# Altium PCB 2014_ConnecteurChargeur.PCBDOC
Units mil, origin at the board's own origin, x right, y up, seen from the top; angles counter-clockwise.
Board outline 1191.13 x 994.28 mil, 4 copper layers (1-TOP, 2-GND, 3-SIGNAL, 4-BOTTOM); 8 components, 2 nets, 60 pads, 9 vias.
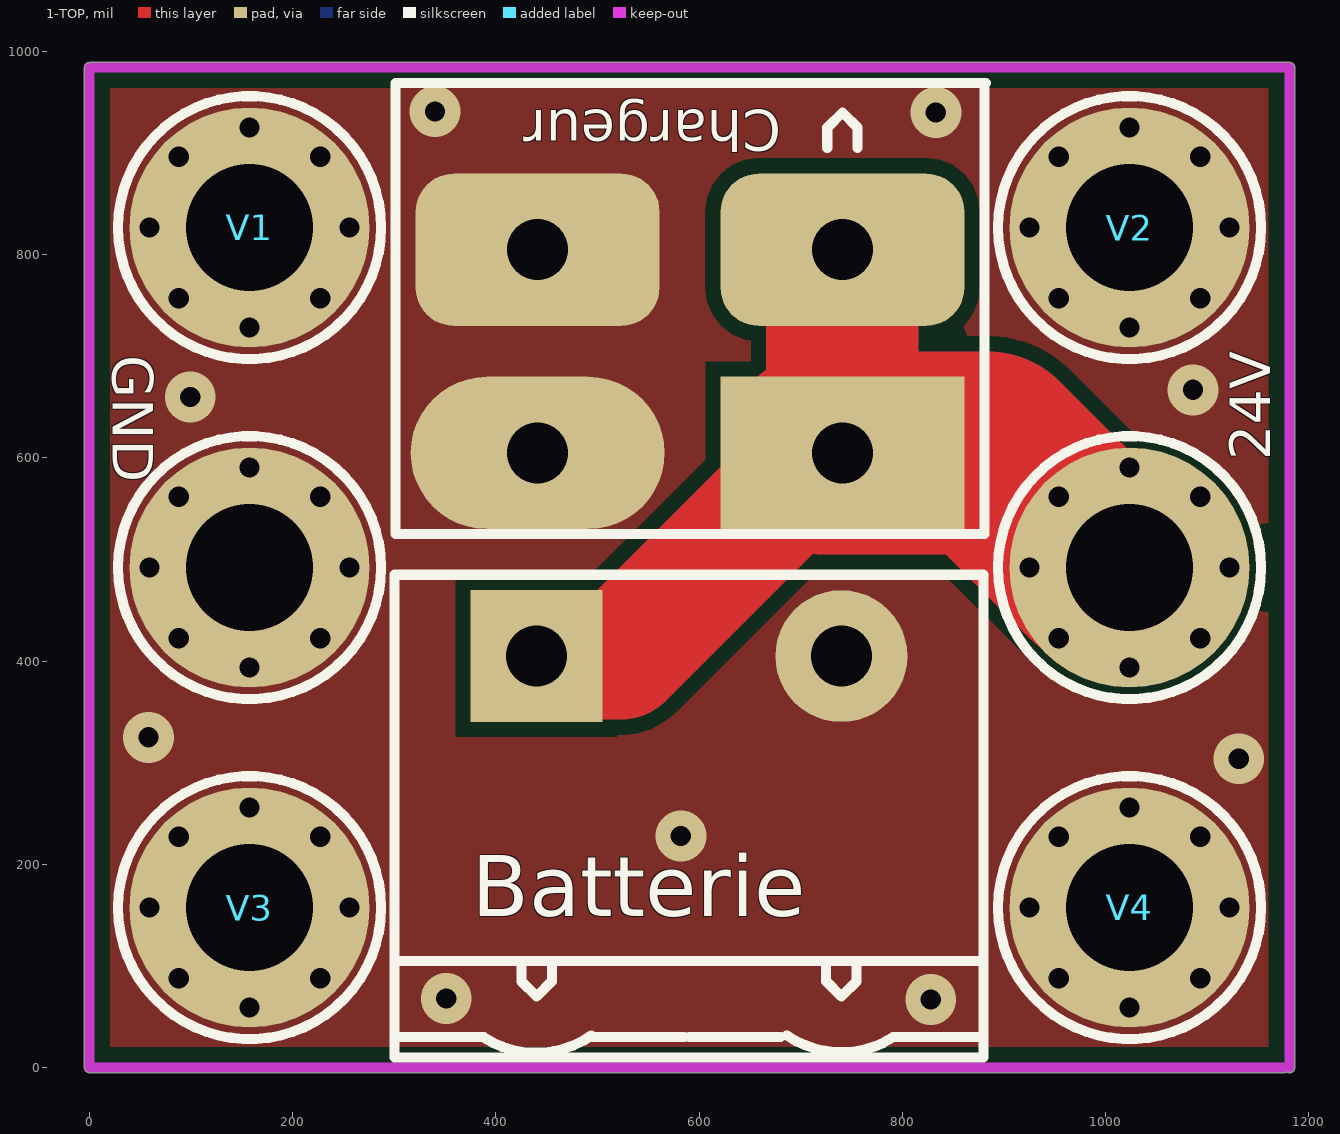
[diagram p0: 1-TOP view]
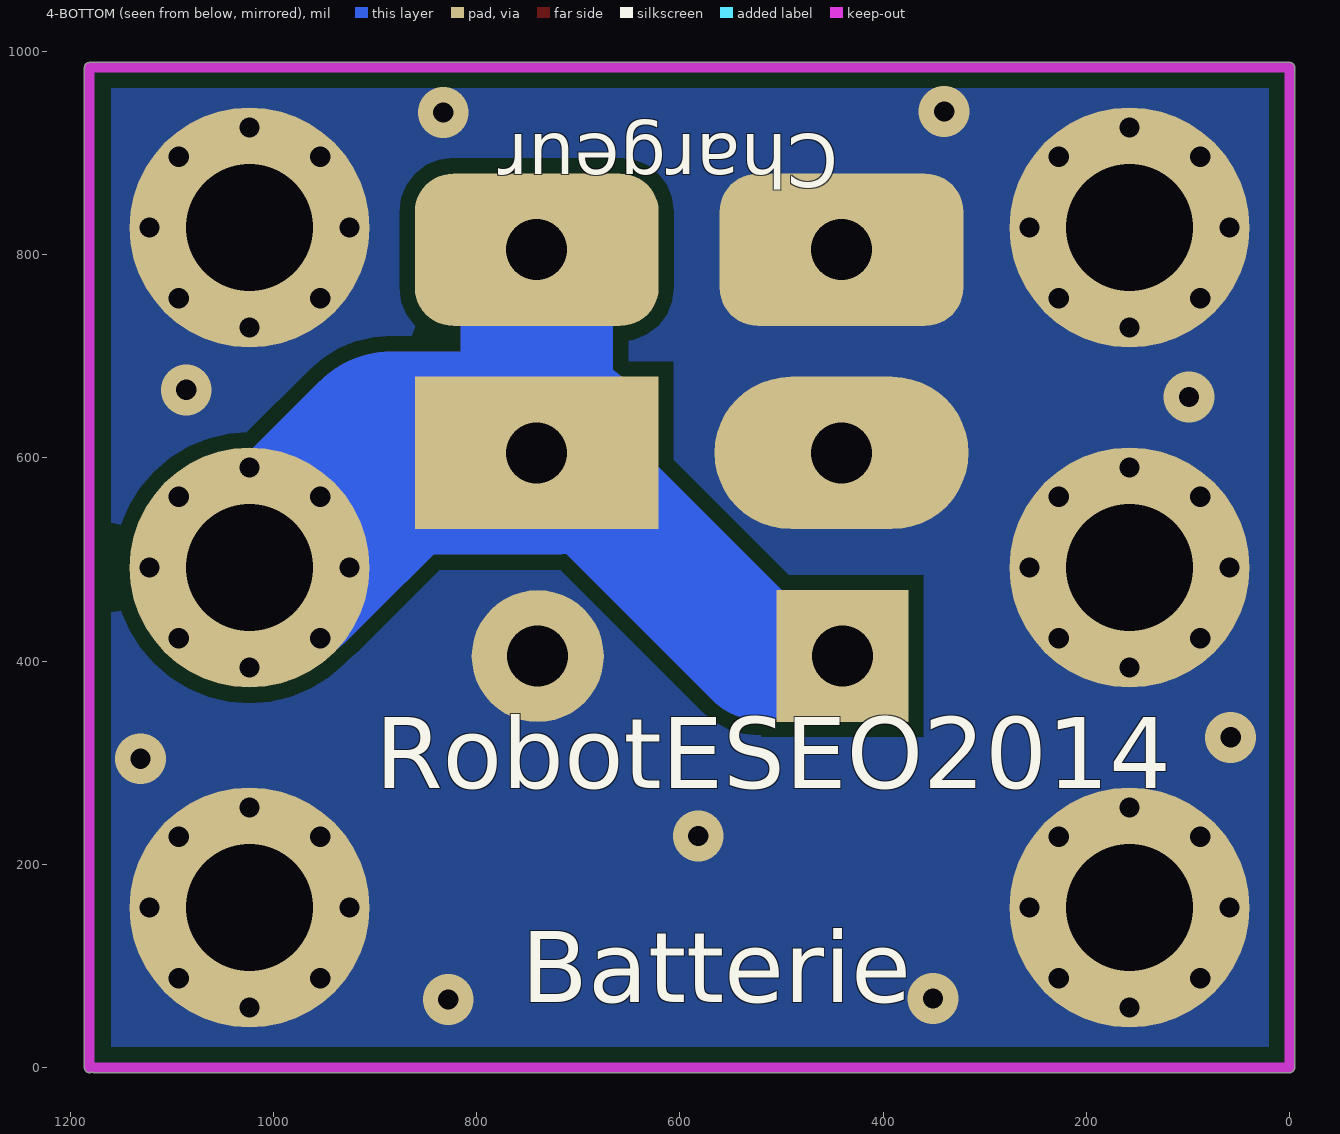
[diagram p1: 4-BOTTOM view, seen from below]
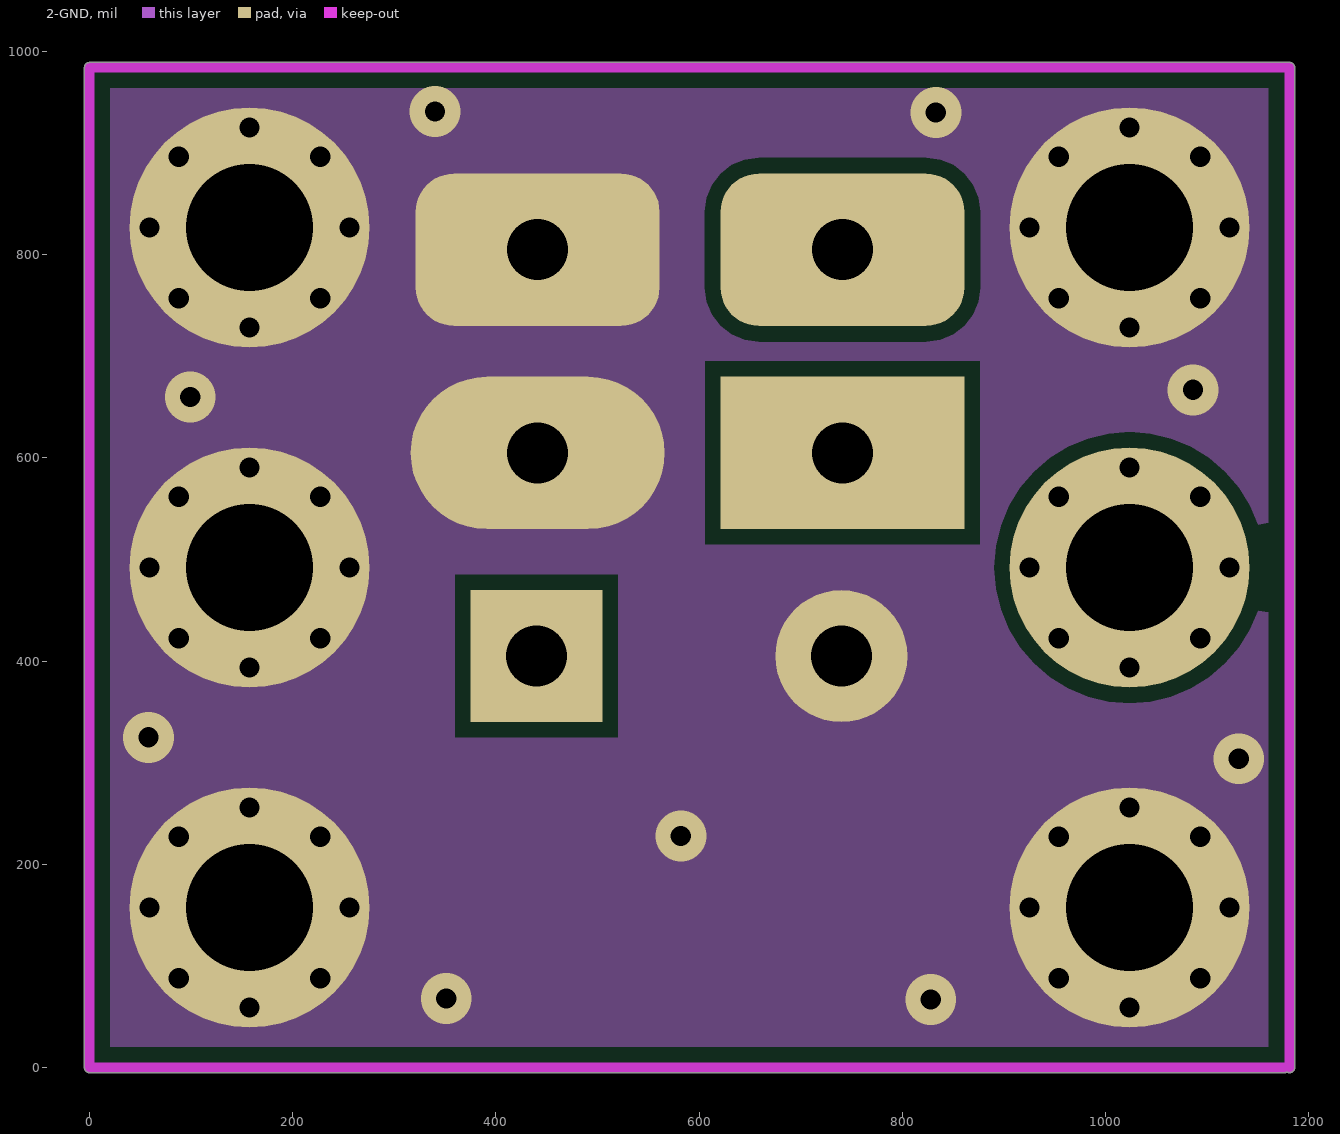
[diagram p2: 2-GND]
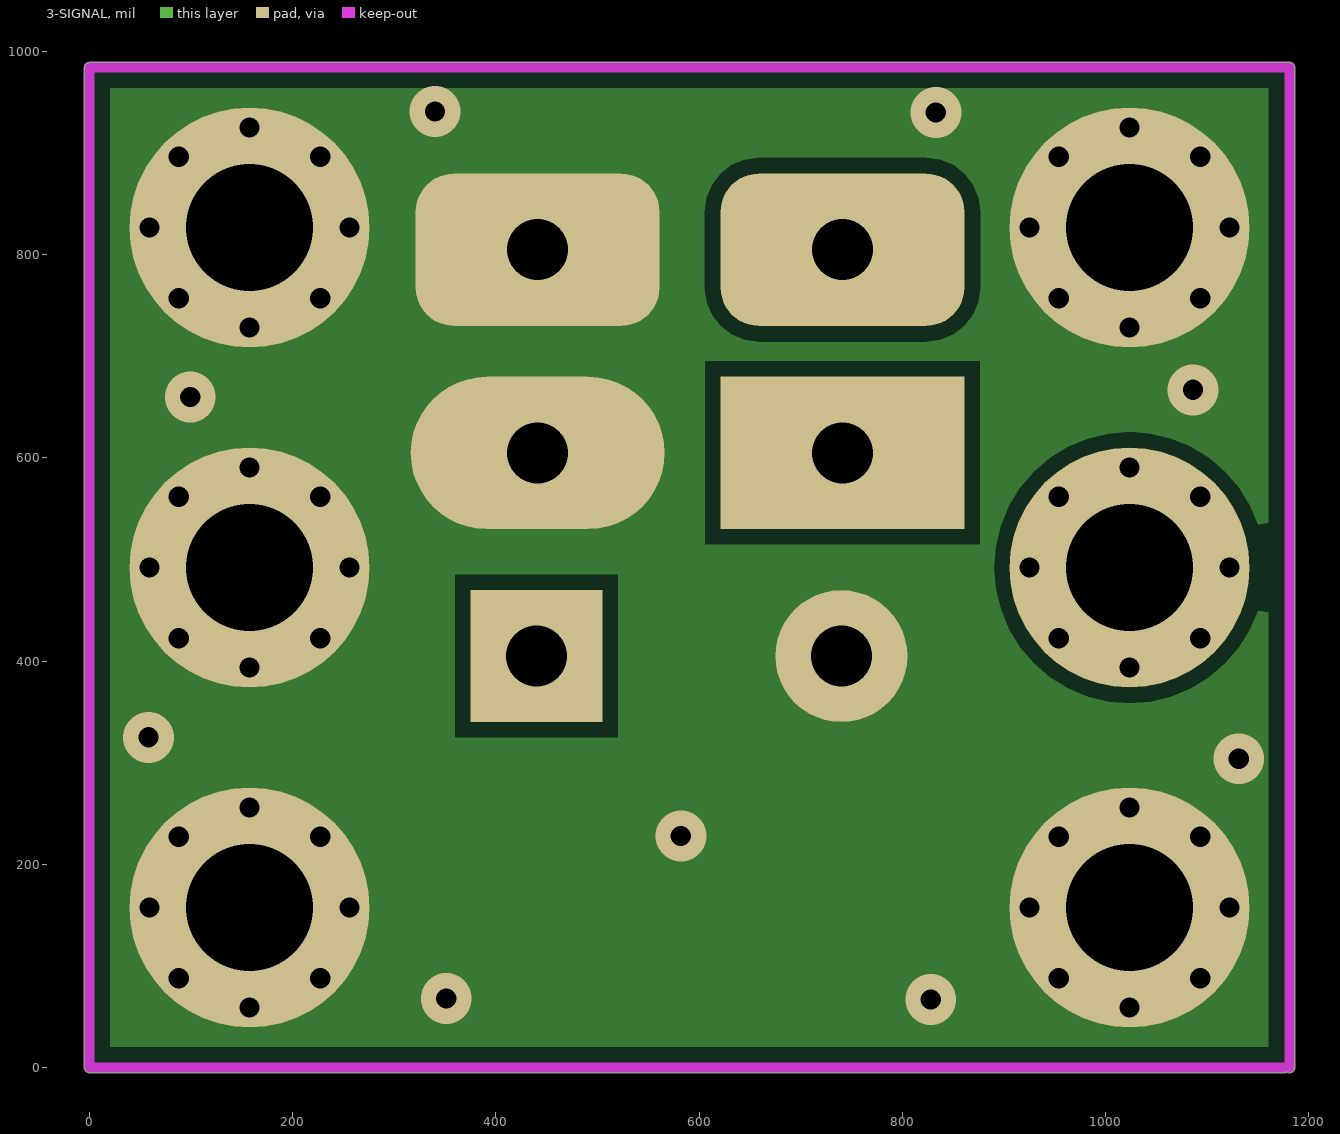
[diagram p3: 3-SIGNAL]

## Layer stack, top to bottom
1-TOP: signal copper 1.4
Dielectric: prepreg 12.6, FR-4, Dk 4.8
2-GND: signal copper 1.4
Dielectric: core 12.6, FR-4, Dk 4.8
3-SIGNAL: signal copper 1.4
Dielectric: prepreg 12.6, FR-4, Dk 4.8
4-BOTTOM: signal copper 1.4

## Board outline
-5.01,0 ccw(c0,0) 0,-5.01 1176,-5.01 ccw(c1176,0) 1178.55,-4.32 ccw(c1181.1,0) 1186.12,0 1186.12,984.25 ccw(c1181.1,984.25) 1181.1,989.27 0,989.27 ccw(c0,984.25) -5.01,984.25

## Design rules (kind name [scope] priority, off if disabled: settings)
Clearance Clearance_1 [InNamedPolygon('1-GND') Or  InNamedPolygon('2-GND') Or  InNamedPolygon('3-GND') Or  InNamedPolygon('4-GND')] p1: gap=15
Clearance [All] p2: gap=7
FabricationTestPointUsage TestPointUsage [All] p1: valid=0 allowmultiple=FALSE
FabricationTestpoint Testpoint [All] p1: side=3 testpointundercomponent=TRUE minsize=40 maxsize=100 preferedsize=60 minholesize=0 maxholesize=40 preferedholesize=32 testpointgrid=1 allowsidetop=TRUE allowsidebottom=TRUE usegrid=TRUE gridtolerance=0.01
PlaneClearance [All] p1: clearance=10
PlaneConnect [All] p1: planeconnectstyle=Direct reliefexpansion=25 reliefentries=4 reliefconductorwidth=12 reliefairgap=15
PolygonConnect [All] p1: connectstyle=Direct reliefconductorwidth=10 reliefentries=4 polygonreliefangle="90 Angle"
RoomDefinition 2014_ConnecteurChargeur [InComponentClass('2014_ConnecteurChargeur')] p1: confinementstyle=ConfineIn formatcopy=TRUE lockcomponents=FALSE outline 2139,56 3229.6,56 3229.6,412 2139,412
RoutingLayers RoutingLayers_1 [All] p1: top layer_v5=TRUE mid layer 1_v5=FALSE mid layer 2_v5=FALSE bottom layer_v5=TRUE
RoutingLayers [All] p2: top layer_v5=TRUE mid layer 1_v5=FALSE mid layer 2_v5=FALSE bottom layer_v5=TRUE
RoutingVias [All] p1: holewidth=28 width=50 viastyle="Through Hole" minholewidth=28 minwidth=50 maxholewidth=28 maxwidth=50
SilkscreenOverComponentPads [All] p1: minsilkscreentomaskgap=10
SolderMaskExpansion [All] p1: expansion=0
Width [All] p1: maxlimit=250 minlimit=10 preferedwidth=15
22 further rules are at their usual default settings.

## Components (designator, comment, footprint, x,y, rotation, side; value= is the part's Value field where it differs from the comment)
24V "Pad_M3" "M3x6mm_8 vias" 1023.62,492.13 r0 top
Batterie "FEMELLE A SOUDER 7.62mm" BORNIER2_FEM_COUDE#1 440,405 r0 top
Chargeur "MALE A SOUDER 7.62mm" BORNIER2_FEM_COUDE#2 741,605 r180 top
GND "Pad_M3" "M3x6mm_8 vias" 157.48,492.13 r0 top
V1 "Pad_M3" "M3x6mm_8 vias" 157.48,826.77 r0 top locked
V2 "Pad_M3" "M3x6mm_8 vias" 1023.62,826.77 r0 top locked
V3 "Pad_M3" "M3x6mm_8 vias" 157.48,157.48 r0 top locked
V4 "Pad_M3" "M3x6mm_8 vias" 1023.62,157.48 r0 top locked

## Footprints (in the part's own frame and the unit in brackets; to place one, negate y for a bottom-side part, rotate by r counter-clockwise, add the part's x,y. Pads: shape width x height; smd on the part's side, far side on the other; paste and mask are expansions set on the pad)
BORNIER2_FEM_COUDE#1 [mil] "Connector; Header; 2 Position; Right Angle; Female; Pin Spacing=5.08mm Green"
  rect 130x130 hole 60: 1(0,0)
  round 130 hole 60: 2(300,0)
  silkscreen extent -140,-395 440,80
BORNIER2_FEM_COUDE#2 [mil] "Connector; Header; 2 Position; Right Angle; Female; Pin Spacing=5.08mm Green"
  rect 240x150 hole 60: 1(0,0)
  oval 250x150 hole 60: 2(300,0)
  silkscreen extent -141,-364 440,80
"M3x6mm_8 vias" [mm] "Vis M3 X 6mm"
  round 0.8 hole 0.508: 1(-2.5,0) 1(-1.768,-1.768) 1(-1.768,1.768) 1(0,-2.5) 1(0,2.5) 1(1.768,-1.768) 1(1.768,1.768) 1(2.5,0)
  round 6 hole 3.175: 1(0,0)
  silkscreen extent -3.29,-3.28 3.29,3.28

## Part data
24V GND V1 V2 V3 V4: library part "Vis M3 X 6mm _TORX_Tête 6mm", "Vis M3 X 6mm _TORX_Tête 6mm"
Batterie Chargeur: library part BORNIER2, "Terminal blocks, 2 pins, pitch=5mm"

## Free pads (board coordinates)
  rrect50% 240x150 hole 60: 0(441,805) 0(741,805)

## Via types
v1: diameter 50, hole 20, 1-TOP to 4-BOTTOM, 9 vias

## Nets (pads, with @x,y where several pads share a name; then routed paths per layer and width w, separated by ;. In a path a pad name is that pad's centre, name@x,y a point inside that pad or via, vN(x,y) a via of type N, cw(c..) or ccw(c..) an arc to the next point about the centre after c; other vN are vias at no path point)
24V: 24V.1 Batterie.1 Chargeur.1 pad.0@741,805 | length 1811.4
  1-TOP w125: Batterie.1 523,405 Chargeur.1@723,605
  1-TOP w150: Chargeur.1 pad.0@741,797
  1-TOP w200: Chargeur.1@723,605 Chargeur.1 884,605 996.87,492.13 24V.1@1023.62,492.13
  4-BOTTOM w125: Batterie.1 523,405 Chargeur.1@723,605
  4-BOTTOM w150: Chargeur.1 pad.0@741,798
  4-BOTTOM w200: Chargeur.1@723,605 Chargeur.1 884,605 996.87,492.13 24V.1@1023.62,492.13
GND: Batterie.2 Chargeur.2 GND.1 pad.0@441,805 V1.1 V2.1 V3.1 V4.1
  other v1: 828,67 351,68 582,228 1131,304 58,325 99,660 1086,667 833,940 340,941

## Polygon pours and split planes (outlines as drawn)
GND on 1-TOP "1-GND" (solid, remove dead copper, pour order 1006): 20,965 1160,965 1160,20 20,20
GND on 2-GND "2-GND" (solid, remove dead copper, pour order 1006): 20,965 1160,965 1160,20 20,20
GND on 3-SIGNAL "3-GND" (solid, remove dead copper, pour order 1006): 20,965 1160,965 1160,20 20,20
GND on 4-BOTTOM "4-GND" (solid, remove dead copper, pour order 1006): 20,965 1160,965 1160,20 20,20

## Keep-outs
Keep-Out Layer:
  lines w10: 1176,0 0,0 0,984.25 1181.1,984.25 1181.1,0

## Silkscreen, mask and mechanical layers (free items; w line width, h text height)
Bottom Overlay:
  text "Chargeur" at 444,936 h90 r180
  text "RobotESEO2014" at 900,252 h120
  text "Batterie" at 756,41 h120

## Dimensions
1023.62,492.13 to 1181.1,984.25 on Mechanical 15
1023.62,826.77 to 1181.1,984.25 on Mechanical 15
1181.1,984.25 to 1023.62,826.77 on Mechanical 15
0,0 to 1181.1,0 on Mechanical 15
0,984.25 to 0,0 on Mechanical 15